# Altium PCB BEAGLEPLAYV020_220915.brd.PcbDoc (part 4 of 12)
Units mil, origin at the board's own origin, x right, y up, seen from the top; angles counter-clockwise.
Board outline 3149.7 x 3149.7 mil, 8 copper layers (TOP, LYR2_GND, LYR3, LAY4_PWR1, LAY5_PWR2, LAY6, LYR7_GND, BOTTOM), stack 60.84 mil thick; 782 components, 546 nets, 2864 pads, 2056 vias.
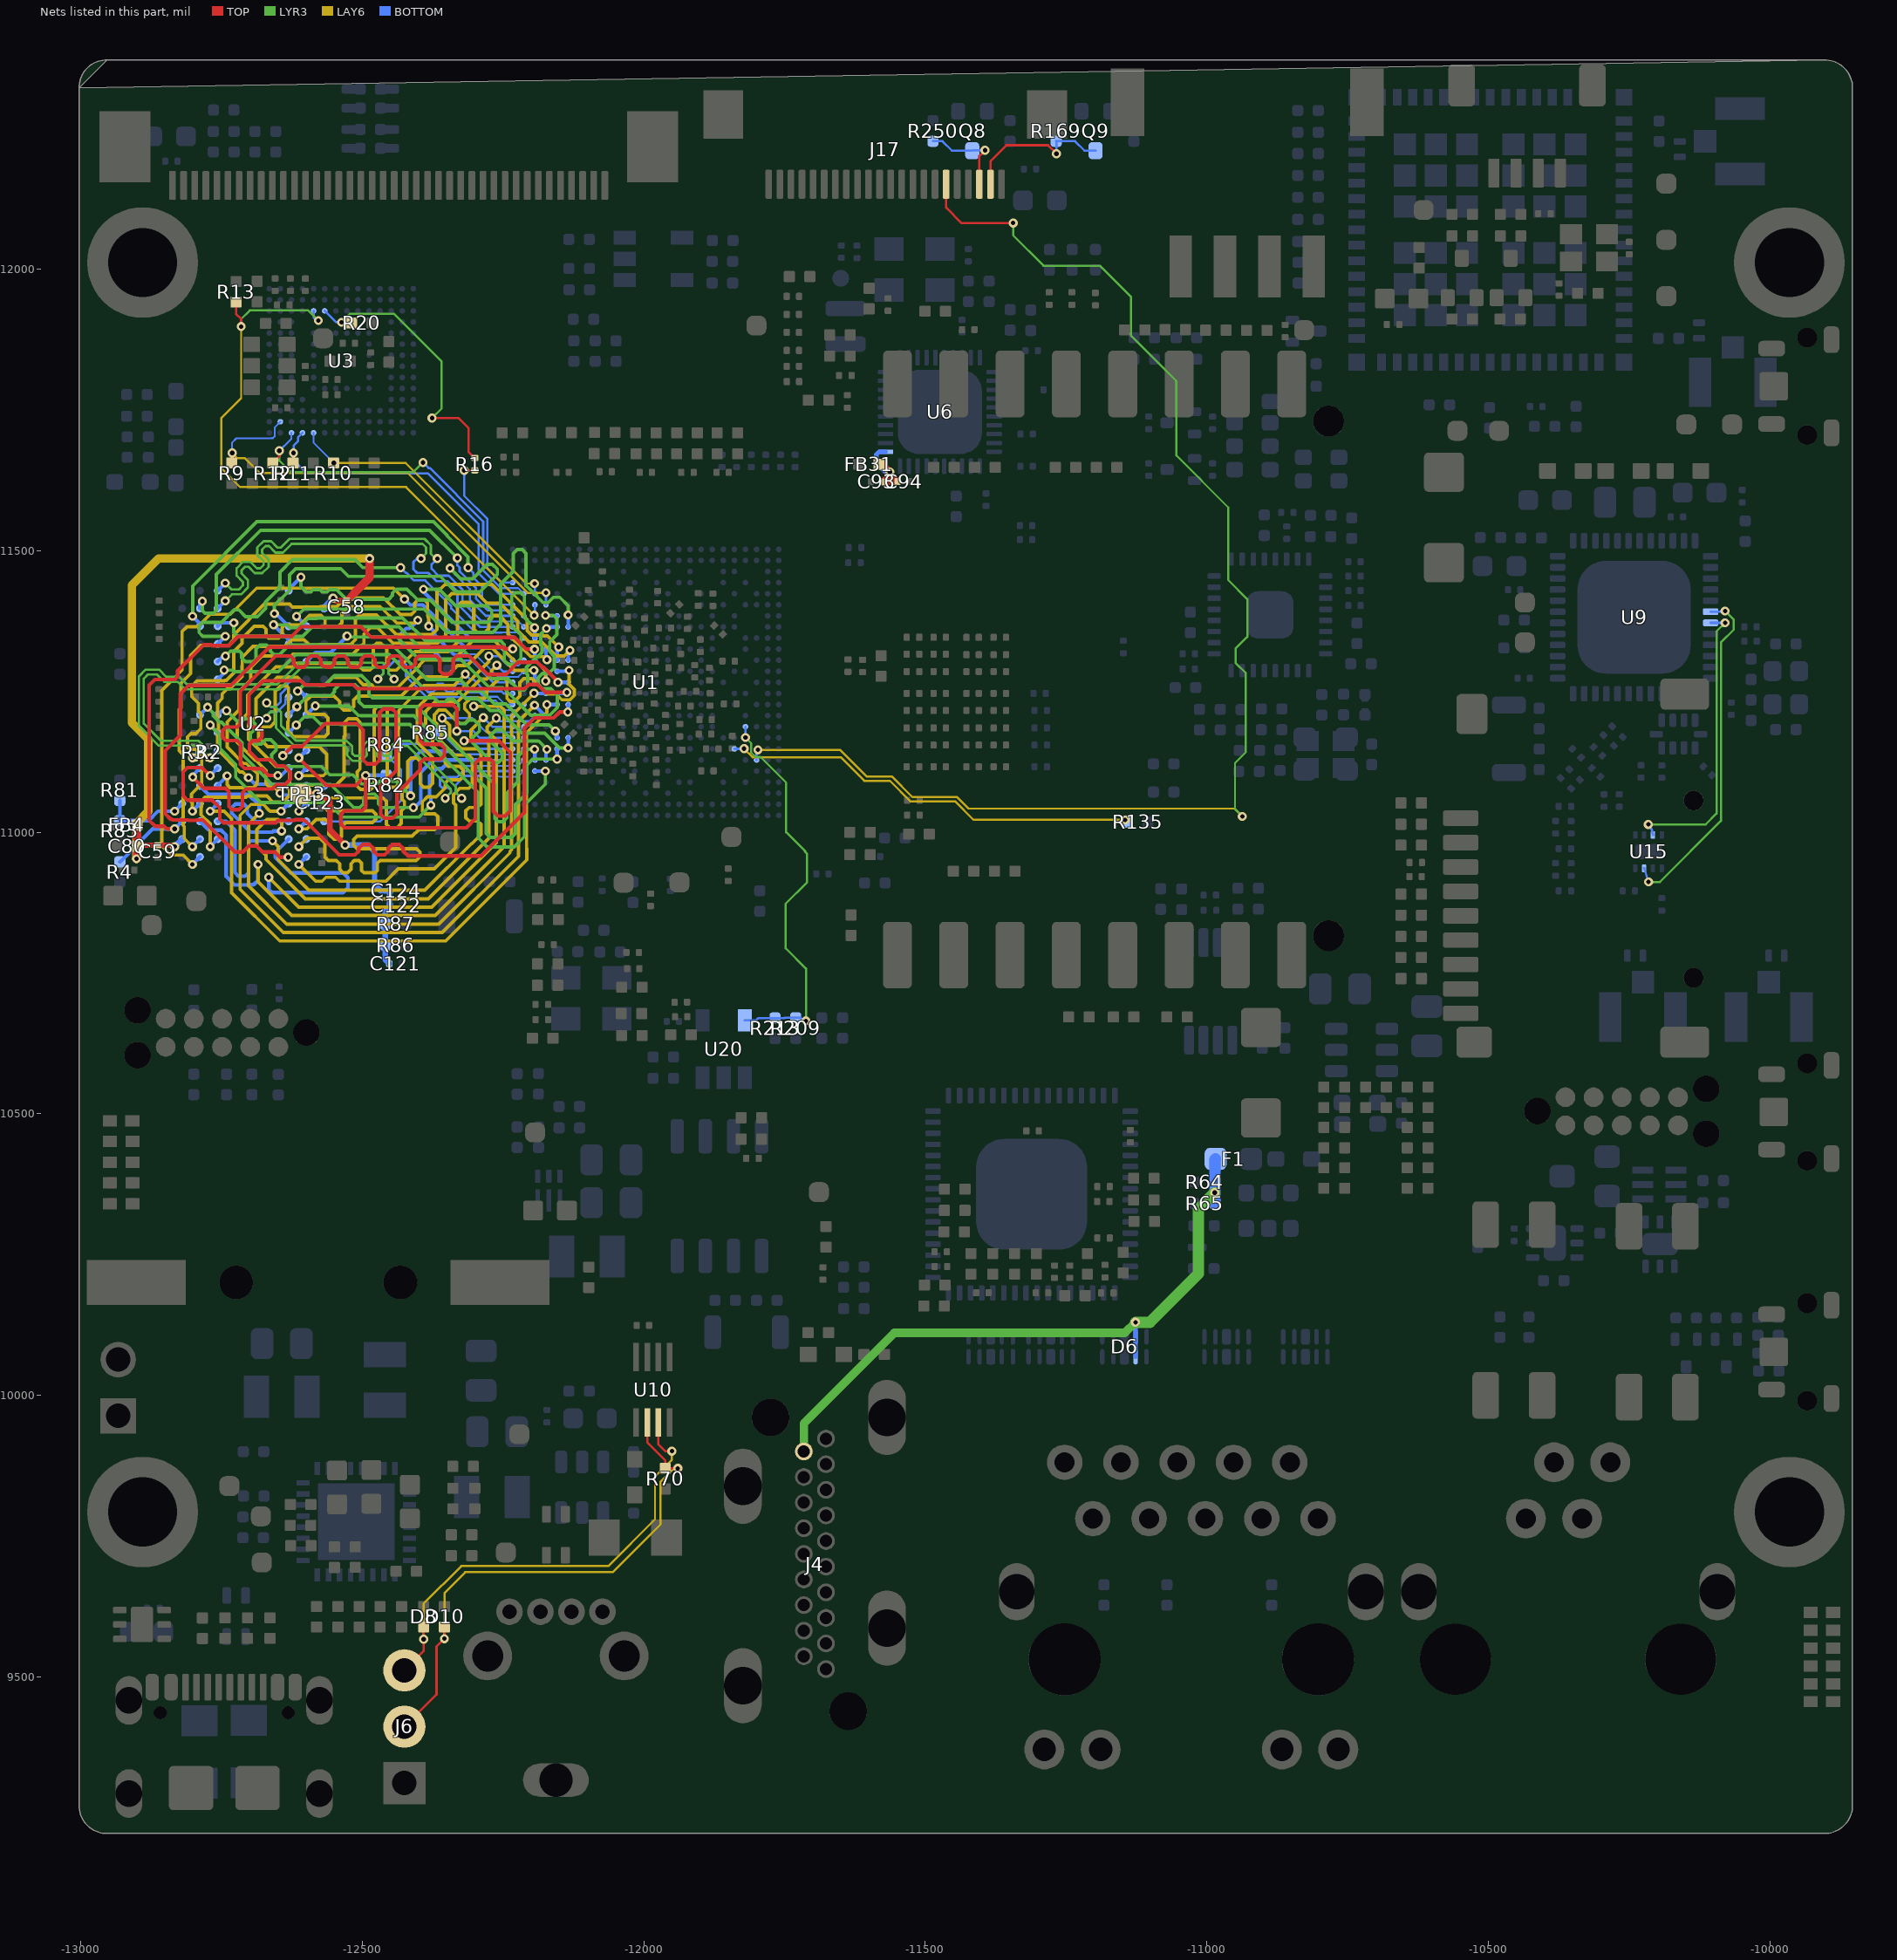
[diagram p10: the nets of this part, all layers, seen from the top]

## Via types
v1: diameter 16/0/16/0/0/0/0/16 (per signal layer), hole 8, TOP to BOTTOM, 334 vias
v2: diameter 16/16/0/0/0/0/16/16 (per signal layer), hole 8, TOP to BOTTOM, 282 vias
v3: diameter 16/0/0/0/0/16/0/16 (per signal layer), hole 8, TOP to BOTTOM, 255 vias
v4: diameter 16/16/0/0/0/16/16/16 (per signal layer), hole 8, TOP to BOTTOM, 253 vias
v5: diameter 16, hole 8, TOP to BOTTOM, 212 vias
v6: diameter 16/16/16/0/0/16/16/16 (per signal layer), hole 8, TOP to BOTTOM, 173 vias
v7: diameter 16/0/0/16/0/0/0/16 (per signal layer), hole 8, TOP to BOTTOM, 131 vias
v8: diameter 16/0/0/0/16/0/0/16 (per signal layer), hole 8, TOP to BOTTOM, 98 vias
v9: diameter 16/16/0/16/0/0/16/16 (per signal layer), hole 8, TOP to BOTTOM, 93 vias
v10: diameter 16/0/16/0/0/16/0/16 (per signal layer), hole 8, TOP to BOTTOM, 87 vias
v11: diameter 16/16/0/16/0/16/16/16 (per signal layer), hole 8, TOP to BOTTOM, 44 vias
v12: diameter 16/16/16/16/0/16/16/16 (per signal layer), hole 8, TOP to BOTTOM, 40 vias
v13: diameter 16/16/16/0/0/0/16/16 (per signal layer), hole 8, TOP to BOTTOM, 19 vias
v14: diameter 16/0/0/16/0/16/0/16 (per signal layer), hole 8, TOP to BOTTOM, 15 vias
v15: diameter 16/0/0/0/16/16/0/16 (per signal layer), hole 8, TOP to BOTTOM, 13 vias
v16: diameter 16/0/16/0/16/0/0/16 (per signal layer), hole 8, TOP to BOTTOM, 3 vias
v17: diameter 16/0/16/16/0/0/0/16 (per signal layer), hole 8, TOP to BOTTOM, 3 vias
v18: diameter 16/16/16/16/0/0/16/16 (per signal layer), hole 8, TOP to BOTTOM, 1 vias

## Nets (pads, with @x,y where several pads share a name; then routed paths per layer and width w, separated by ;. In a path a pad name is that pad's centre, name@x,y a point inside that pad or via, vN(x,y) a via of type N, cw(c..) or ccw(c..) an arc to the next point about the centre after c; other vN are vias at no path point) (continued)
CSI0_GPIO1: J17.17 U1.F23 | length 2414.5
  TOP w4: J17.17@-11463.03,12150.73 -11463.03,12109.03 -11436,12082 v1(-11344,12082)
  LYR3 w3.8: v1(-11344,12082) -11344,12060 -11290,12006 -11190,12006 -11134.5,11950.5 -11134.5,11881.5 -11054,11801 -11054,11669 -10961.9,11576.9 -10961.9,11447.9 -10928,11414 -10928,11347 -10948.9,11326.1 -10948.9,11300.9 -10931,11283 -10931,11142 -10950,11123 -10950,11041 v10(-10937,11028)
  LAY6 w3.8: -11697,11146.41 -11651.57,11146.41 -11604.36,11099.2 -11559.68,11099.2 -11522.74,11062.26 -11443.46,11062.26 -11423.2,11042 -10951,11042 v10(-10937,11028)
  LAY6 w4: v3(-11797.32,11146.41) -11697,11146.41
  BOTTOM w4: U1.F23@-11799.65,11128.4 -11799.65,11144 -11797.32,11146.33 v3(-11797.32,11146.41)
CSI0_GPIO2: R135.1 U1.G21 | length 752.4
  LAY6 w3.8: -11697,11133.21 -11650.21,11133.21 -11608.4,11091.4 -11562.92,11091.4 -11525.98,11054.46 -11446.7,11054.46 -11414.24,11022 v3(-11145,11022)
  LAY6 w4: v3(-11821.83,11148.49) -11806.55,11133.21 -11697,11133.21
  BOTTOM w4: U1.G21@-11839.02,11148.09 -11823.4,11148.09 -11823,11148.49 v3(-11821.83,11148.49) ; v3(-11145,11022) -11144.81,11022 R135.1@-11140.85,11018.04
CSI_SCL: J17.20 Q8.3 R250.2 | length 164.1
  TOP w4: J17.20@-11403.98,12150.73 -11403.98,12201.02 v5(-11394,12211)
  BOTTOM w4: R250.2@-11486.5,12227.13 -11469.65,12227.13 -11452.86,12210.34 Q8.3@-11416.66,12210.34 -11416,12211 v5(-11394,12211)
CSI_SDA: J17.21 Q9.3 R169.2 | length 275.4
  TOP w4: J17.21@-11384.29,12150.73 -11384.29,12191.71 -11356,12220 -11282,12220 v5(-11267,12205)
  BOTTOM w4: v5(-11267,12205) -11267,12226.57 R169.2@-11267.56,12227.13 -11233.95,12227.13 -11217.16,12210.34 Q9.3@-11197.66,12210.34
DDR_A0: U1.J1 U2.P3 | length 1141.4
  LAY6 w6: v3(-12643.13,11002.3) -12643.13,11016.8 -12648.84,11022.51 -12669.49,11022.51 -12687,11005 -12687,10975 -12671,10959 -12671,10951.78 -12601.22,10882 -12382.66,10882 -12275.1,10989.56 -12275.1,11158 -12280.1,11163 -12301,11163 -12307,11169 -12307,11181.7 v3(-12285,11203.7)
  BOTTOM w4: v3(-12285,11203.7) -12268.76,11187.46 U1.J1@-12232.72,11187.46
  BOTTOM w6.6: v3(-12643.13,11002.3) -12657.63,11002.3 -12659.56,11000.37 -12698.36,11000.37 -12732.05,11034.06 -12732.05,11043.4 -12725.45,11050 -12710,11050 -12704,11044 -12704,11033.58 -12689.13,11018.71 -12676.85,11018.71 -12676.11,11019.45 U2.P3@-12630.66,11019.45
DDR_A1: U1.J2 U2.P7 | length 1152.2
  LAY6 w6: v3(-12659.23,10984.77) -12648.97,10974.51 -12648.97,10950.97 -12595,10897 -12388.88,10897 -12306.18,10979.7 -12305.3,10979.7 -12289,10996 -12289,11013.99 -12295,11019.99 -12310,11019.99 -12316,11025.99 -12316,11037.99 -12310,11043.99 -12295,11043.99 -12289,11049.99 -12289,11142 -12295,11148 -12324.01,11148 -12345,11168.99 -12345,11189.7 v3(-12358,11202.7)
  BOTTOM w3.2: -12289,11186.7 -12279.96,11177.66 -12222.84,11177.66 U1.J2@-12213.04,11187.46
  BOTTOM w4: v3(-12358,11202.7) -12305,11202.7 -12289,11186.7
  BOTTOM w6.6: U2.P7@-12756.66,11019.45 -12741.66,11019.45 -12726,11003.79 -12726,10928 -12720,10922 -12708,10922 -12702,10928 -12702,10981 -12698.23,10984.77 v3(-12659.23,10984.77)
DDR_A2: U1.K3 U2.R3 | length 1154.6
  LAY6 w6: v3(-12666,10920) -12613,10867 -12376.44,10867 -12262,10981.44 -12262,11164 -12278,11180 -12278,11186.7 v3(-12262,11202.7)
  BOTTOM w3.2: v3(-12262,11202.7) -12261,11202.7 -12255.64,11197.34 -12203.15,11197.34 U1.K3@-12193.35,11207.14
  BOTTOM w6.6: v3(-12666,10920) -12666,10899 -12660,10893 -12534.25,10893 -12525.25,10902 -12525.25,10919.25 -12533.7,10927.7 -12626.69,10927.7 -12654.55,10955.56 -12654.55,10964.06 U2.R3@-12630.66,10987.95
DDR_A3: U1.L5 U2.N7 | length 1122.7
  LAY6 w6: v3(-12770.1,11037.51) -12745.5,11037.51 -12732,11024.01 -12732,10892.56 -12646.44,10807 -12351.56,10807 -12207.6,10950.96 -12207.6,10970.92 -12208.17,10971.49 -12208.17,11176.66 -12172,11212.83 v3(-12172,11226.83)
  BOTTOM w6.6: v3(-12770.1,11037.51) U2.N7@-12756.66,11050.95 ; v3(-12172,11226.83) U1.L5@-12153.98,11226.83
DDR_A4: U1.K4 U2.N3 | length 1126.5
  LAY6 w6: v3(-12644.1,11037.51) -12663.51,11037.51 -12665,11039 -12665.22,11039 -12675.6,11049.38 -12697.62,11049.38 -12717,11030 -12717,10898.78 -12640.22,10822 -12357.78,10822 -12222.6,10957.18 -12222.6,11197 v3(-12193.97,11225.63)
  BOTTOM w6.6: v3(-12644.1,11037.51) U2.N3@-12630.66,11050.95 ; v3(-12193.97,11225.63) -12175.48,11207.14 U1.K4@-12173.66,11207.14
DDR_A5: U1.K1 U2.P8 | length 1143.9
  LAY6 w6: v3(-12685,10943) -12685,10912 -12625,10852 -12370.22,10852 -12247.8,10974.42 -12247.8,11216.79 -12254.71,11223.7 v3(-12302,11223.7)
  BOTTOM w4: v3(-12302,11223.7) -12263,11223.7 -12246.44,11207.14 U1.K1@-12232.72,11207.14
  BOTTOM w6.6: U2.P8@-12788.16,11019.45 -12772.71,11004 -12763.28,11004 -12762.83,11003.55 -12750.19,11003.55 -12741.6,10994.96 -12741.6,10921.53 -12726.47,10906.4 -12701.53,10906.4 -12700.93,10907 -12693,10907 -12685,10915 v3(-12685,10943)
DDR_A6: U1.R2 U2.P2 | length 1120.7
  LAY6 w6: v3(-12612.6,11006.01) -12598.1,11006.01 -12581.6,11022.51 -12565.52,11022.51 -12559.32,11016.31 -12559.32,10996.32 -12550.43,10987.43 -12542.32,10987.43 -12537,10992.75 -12537,11009.83 -12529.32,11017.51 -12481.61,11017.51 -12475.61,11023.51 -12475.61,11032 -12481.61,11038 -12561.18,11038 -12567.19,11044.01 -12567.19,11056.5 -12562.69,11061 -12463,11061 -12457,11055 -12457,11014.31 -12451,11008.31 -12438,11008.31 -12430.67,11015.64 -12430.67,11037.9 -12425,11043.57 -12425,11054.48 -12429,11058.48 -12429,11070.92 -12419,11080.92 -12419,11125.77 -12413,11131.77 -12403,11131.77 -12397,11125.77 -12397,11086 -12391,11080 -12381.49,11080 -12375,11086.49 -12375,11132.77 -12402.2,11159.97 -12402.2,11221.03 -12377.44,11245.79 -12331.97,11245.79 -12275,11302.76 v3(-12275,11312.7)
  BOTTOM w3.2: v3(-12275,11312.7) -12257.99,11312.7 -12241.06,11295.77 -12222.84,11295.77 U1.R2@-12213.04,11305.57
  BOTTOM w6.6: v3(-12612.6,11006.01) U2.P2@-12599.16,11019.45
DDR_A7: U1.P2 U2.R8 | length 1138.5
  LAY6 w6: v3(-12801.6,10974.51) -12816,10988.91 -12816,11010.14 -12818.1,11012.24 -12818.1,11138.23 -12825,11145.13 -12825,11218 -12822,11221 -12822,11264.78 -12805,11281.78 -12805,11314.01 -12787.01,11332 -12737.89,11332 -12728.22,11341.67 -12728.22,11350.56 -12673.78,11405 -12629.01,11405 -12624.06,11400.05 -12606.84,11400.05 -12606.58,11400.31 -12575.08,11400.31 -12574.7,11400.69 -12545.55,11400.69 -12530.24,11416 -12462.07,11416 -12432.57,11386.5 -12413,11386.5 -12407,11392.5 -12407,11407 -12401,11413 -12390,11413 -12384,11407 -12384,11384.35 -12382.87,11383.22 -12382.87,11381.37 -12382,11380.5 v3(-12382,11366)
  BOTTOM w3.2: -12337.6,11316.1 -12299.4,11316.1 -12259.38,11276.08 -12222.84,11276.08 U1.P2@-12213.04,11285.88
  BOTTOM w6.6: v3(-12801.6,10974.51) U2.R8@-12788.16,10987.95 ; v3(-12382,11366) -12371.53,11355.53 -12371.53,11350.03 -12337.6,11316.1
DDR_A8: U1.P1 U2.R2 | length 1149.1
  LAY6 w6: v3(-12612.6,10974.51) -12597.6,10989.51 -12574.88,10989.51 -12566.1,10980.73 -12566.1,10956.01 -12560.09,10950 -12546.25,10950 -12540.25,10944 -12540.25,10934.14 -12534.25,10928.14 -12525.76,10928.14 -12519.76,10934.14 -12519.76,10944 -12514.12,10949.64 -12505.64,10949.64 -12501,10945 -12501,10932 -12497,10928 -12477,10928 -12473,10932 -12473,10945 -12468,10950 -12403.99,10950 -12397.48,10956.51 -12397.48,10965 -12403.48,10971 -12509,10971 -12515,10977 -12515,10987 -12509,10993 -12411.22,10993 -12399.22,11005 -12372,11005 -12366,11011 -12366,11028 -12371,11033 -12389,11033 -12393.25,11037.25 -12393.25,11053.97 -12384.22,11063 -12368.45,11063 -12353,11078.45 -12353,11086.98 -12347,11092.98 -12327,11092.98 -12321,11098.98 -12321,11110.98 -12327,11116.98 -12347,11116.98 -12353,11122.98 -12353,11131.99 -12375,11153.99 -12375,11178.39 -12387.2,11190.59 -12387.2,11214.81 -12371.22,11230.79 -12331.21,11230.79 -12289.8,11272.2 -12278.8,11272.2 -12270.9,11280.1 -12270.9,11286.8 v3(-12261,11296.7)
  BOTTOM w4: v3(-12261,11296.7) -12250.18,11285.88 U1.P1@-12232.72,11285.88
  BOTTOM w6.6: v3(-12612.6,10974.51) U2.R2@-12599.16,10987.95
DDR_A9: U1.P4 U2.R7 | length 1133.7
  LAY6 w6: v3(-12770.1,10974.51) -12770.1,11014.88 -12786.1,11030.88 -12786.1,11044.14 -12785.1,11045.14 -12785.1,11056 -12779.1,11062 -12706.22,11062 -12703.84,11064.38 -12669.38,11064.38 -12659,11054 -12640.42,11054 -12629.1,11065.32 -12629.1,11106.73 -12639.37,11117 -12654,11117 -12702,11165 -12702,11191.34 -12688.73,11204.61 -12688.73,11237.4 -12651.13,11275 -12615.22,11275 -12602.22,11262 -12565.57,11262 -12552.57,11275 -12511,11275 -12498,11262 -12483.58,11262 -12478.58,11257 -12437.11,11257 -12398.37,11295.74 -12398.37,11297.22 -12389.59,11306 -12338,11306 -12304,11340 -12265.39,11340 -12227.19,11301.8 -12189.21,11301.8 -12174.23,11286.82 v3(-12174.23,11268.6)
  BOTTOM w6.6: v3(-12770.1,10974.51) U2.R7@-12756.66,10987.95 ; v3(-12174.23,11268.6) -12173.66,11269.17 U1.P4@-12173.66,11285.88
DDR_A10: U1.R5 U2.M3 | length 1133.8
  LAY6 w6: v3(-12702,11097) -12712.26,11107.26 -12717.26,11107.26 -12757,11147 -12757,11182.27 -12755.1,11184.17 -12755.1,11196.61 -12757,11198.51 -12757,11229.33 -12748.73,11237.6 -12748.73,11245.72 -12739.56,11254.89 -12734.9,11254.89 -12713.22,11276.57 -12713.22,11295.77 -12713,11295.99 -12713,11311 -12694,11330 -12637,11330 -12625,11342 -12603.01,11342 -12593.9,11332.89 -12577.78,11332.89 -12577.28,11333.39 -12520.78,11333.39 -12512,11342.17 -12512,11379.01 -12505.01,11386 -12474.51,11386 -12439.51,11351 -12376.49,11351 -12367.5,11359.99 -12367.5,11360.5 -12367,11361 -12367,11426 -12353,11440 -12269.3,11440 -12206.97,11377.67 -12206.97,11357.87 -12199.36,11350.26 -12179.65,11350.26 -12178.39,11349 -12171,11349 v3(-12151,11329)
  BOTTOM w6.6: v3(-12702,11097) -12690.24,11085.24 -12638.88,11085.24 -12638.64,11085 -12633.21,11085 U2.M3@-12630.66,11082.45 ; U1.R5@-12153.98,11305.57 -12153.98,11326.02 v3(-12151,11329)
DDR_A11: U1.P5 U2.T2 | length 1125.4
  LAY6 w6: v3(-12612.6,10943.01) -12582.59,10913 -12571.33,10913 -12564.33,10920 -12547.33,10920 -12540.33,10913 -12458,10913 -12436,10935 -12372.1,10935 -12334,10973.1 -12334,11048 -12338,11052 -12338,11067 -12327,11078 -12311,11078 -12305,11084 -12305,11130.99 -12311.01,11137 -12335.99,11137 -12360,11161.01 -12360,11184.61 -12372.2,11196.81 -12372.2,11208.59 -12363.89,11216.9 -12352.11,11216.9 -12328.73,11193.52 -12317.98,11193.52 -12309.5,11202 -12309.5,11210.49 -12318.16,11219.15 -12318.16,11227.63 -12307.89,11237.9 -12283.1,11237.9 -12279,11242 -12279,11251 -12257,11273 -12247,11273 -12243,11269 -12243,11238 -12237.74,11232.74 -12229.26,11232.74 -12220,11242 -12220,11266 -12213,11273 -12198.72,11273 -12171.72,11246 -12156,11246 -12145.32,11235.32 -12131.2,11235.32 -12123.59,11242.93 -12123.59,11253.71 -12132.63,11262.75 v3(-12132.63,11287.58)
  BOTTOM w6.6: v3(-12612.6,10943.01) U2.T2@-12599.16,10956.45 ; U1.P5@-12153.98,11285.88 -12134.33,11285.88 v3(-12132.63,11287.58)
DDR_A12: U1.R6 U2.M7 | length 1118
  LAY6 w6: v3(-12740,11100) -12740,11084.38 -12735,11079.38 -12693.11,11079.38 -12687.11,11085.38 -12687.11,11089.26 -12686,11090.37 -12686,11103.63 -12695.37,11113 -12696.78,11113 -12706.04,11122.26 -12711.04,11122.26 -12740,11151.22 -12740,11195.78 -12718.73,11217.05 -12718.73,11249.84 -12698.22,11270.35 -12698.22,11292.78 -12678,11313 -12625.66,11313 -12622.66,11316 -12516.95,11316 -12497,11335.95 -12497,11351.99 -12485.99,11363 -12472.73,11363 -12445.73,11336 -12365.78,11336 -12352,11349.78 -12352,11413 -12341,11424 -12295.5,11424 -12278.5,11407 -12255.99,11407 -12224,11375.01 -12224,11358.03 -12203.97,11338 -12181,11338 -12156.1,11313.1 -12140.9,11313.1 v3(-12131,11323)
  BOTTOM w6.6: U2.M7@-12756.66,11082.45 -12756.66,11083.34 v3(-12740,11100) ; U1.R6@-12134.3,11305.57 -12134.3,11319.7 v3(-12131,11323)
DDR_A13: U1.R1 U2.T8 | length 1154.4
  LAY6 w6: v3(-12801.6,10943.01) -12818.1,10959.51 -12839.32,10959.51 -12856,10976.19 -12856,11252 -12820,11288 -12820,11356.22 -12811.22,11365 -12792,11365 -12770,11387 -12733.99,11387 -12687.43,11433.56 -12444.56,11433.56 v3(-12425,11414)
  BOTTOM w4: -12316,11327 -12254.15,11327 U1.R1@-12232.72,11305.57
  BOTTOM w6.6: v3(-12801.6,10943.01) U2.T8@-12788.16,10956.45 ; v3(-12425,11414) -12414.53,11403.53 -12392.53,11403.53 -12316,11327
DDR_A14_WEN: U1.N3 U2.L2 | length 1126.2
  LAY6 w6: v3(-12612.6,11100.51) -12569,11100.51 -12563,11106.51 -12563,11138.63 -12576.37,11152 -12667.78,11152 -12684,11168.22 -12684,11179.74 -12676.41,11187.33 -12663.41,11187.33 -12654.63,11196.11 -12654.63,11250.28 -12645.13,11259.78 -12634.1,11259.78 -12631.06,11256.74 -12631.06,11197.77 -12632.22,11196.61 -12632.22,11180.22 -12622,11170 -12566.16,11170 -12560.91,11175.25 -12560.91,11203.31 -12566.91,11209.31 -12594,11209.31 -12600,11215.31 -12600,11233.31 -12591.31,11242 -12549.94,11242 -12540.07,11232.13 -12540.07,11224.29 -12532.89,11217.11 -12521,11217.11 -12515,11223.11 -12515,11235 -12508,11242 -12430.89,11242 -12396.89,11276 -12350.99,11276 -12330.99,11296 -12314,11296 -12283.1,11326.9 -12269.11,11326.9 -12229.81,11287.6 v3(-12195.1,11287.6)
  BOTTOM w6.6: v3(-12612.6,11100.51) U2.L2@-12599.16,11113.95 ; v3(-12195.1,11287.6) -12193.35,11285.85 U1.N3@-12193.35,11266.2
DDR_A15_CAS: U1.M4 U2.M8 | length 1137.7
  LAY6 w6: v3(-12682.99,11033.51) -12702,11014.5 -12702,10905 -12634,10837 -12364,10837 -12237.6,10963.4 -12237.6,10966.4 -12235,10969 -12235,11206.69 v3(-12194.84,11246.85)
  BOTTOM w6.6: U2.M8@-12788.16,11082.45 -12772.85,11067.14 -12702.12,11067.14 -12682.99,11048.01 v3(-12682.99,11033.51) ; v3(-12194.84,11246.85) -12193.1,11246.85 -12192.77,11246.52 U1.M4@-12173.66,11246.52
DDR_A16_RAS: U1.M5 U2.L8 | length 1110.7
  TOP w6.6: v5(-12801,11098) -12781,11078 -12742.87,11078 -12736.87,11072 -12736.87,11046 -12730.87,11040 -12718.87,11040 -12712.87,11046 -12712.87,11070.4 -12706.27,11077 -12659.58,11077 -12652.14,11084.44 -12637.11,11084.44 -12627.8,11093.75 -12627.8,11107.27 -12638.53,11118 -12652,11118 -12662.6,11128.6 -12685.6,11128.6 -12700.4,11143.4 -12700.4,11157.06 -12695,11162.46 -12685,11162.46 -12678,11169.46 -12678,11180.46 -12684,11186.46 -12695,11186.46 -12701,11192.46 -12701,11244 -12676,11269 -12608.99,11269 -12601.99,11262 -12577.75,11262 -12577.5,11261.75 -12563.98,11261.75 -12563.73,11262 -12516,11262 -12509,11255 -12212,11255 -12204.78,11262.22 -12188.36,11262.22 -12180.24,11254.1 -12180.1,11254.1 -12174.32,11248.32 v5(-12136.59,11248.32)
  BOTTOM w6.6: v5(-12801,11098) -12801,11101.11 U2.L8@-12788.16,11113.95 ; U1.M5@-12153.98,11246.52 -12138.39,11246.52 v5(-12136.59,11248.32)
DDR_ACTN: U1.N6 U2.L3 | length 1104.6
  TOP w6.6: v5(-12650,11101) -12666.3,11101 -12678.3,11113 -12694.94,11113 -12695.24,11113.3 -12708.76,11113.3 -12716,11120.54 -12716,11156.75 -12722,11162.75 -12742,11162.75 -12748,11168.75 -12748,11180.75 -12742,11186.75 -12722,11186.75 -12716.6,11192.15 -12716.6,11250.47 -12654.07,11313 -12627.67,11313 -12621.67,11307 -12621.67,11299 -12615.67,11293 -12603.67,11293 -12597.67,11299 -12597.67,11307 -12591.67,11313 -12579.67,11313 -12573.67,11307 -12573.67,11299 -12569.02,11294.35 -12563.98,11294.35 -12562.63,11293 -12555.67,11293 -12549.67,11299 -12549.67,11307 -12543.67,11313 -12531.67,11313 -12525.67,11307 -12525.67,11299 -12519.67,11293 -12507.67,11293 -12501.67,11299 -12501.67,11307 -12495.67,11313 -12483.67,11313 -12477.67,11307 -12477.67,11299 -12471.67,11293 -12459.67,11293 -12453.67,11299 -12453.67,11307 -12447.67,11313 -12435.67,11313 -12429.67,11307 -12429.67,11299 -12423.67,11293 -12411.67,11293 -12405.67,11299 -12405.67,11307 -12399.67,11313 -12368.42,11313 -12362.42,11307 -12362.42,11287 -12356.42,11281 -12344.42,11281 -12338.42,11287 -12338.42,11307 -12332.42,11313 -12309.99,11313 -12276.99,11280 -12244.99,11280 -12222.99,11302 -12201.21,11302 -12201.11,11302.1 -12189.09,11302.1 -12179.47,11292.48 -12177.48,11292.48 -12152.33,11267.33 v5(-12152.33,11266.2)
  BOTTOM w6.6: v5(-12650,11101) -12643.61,11101 U2.L3@-12630.66,11113.95 ; v5(-12152.33,11266.2) U1.N6@-12134.3,11266.2
DDR_ALERTN: R4.2 U1.R3 U2.P9 | length 1203
  TOP w6.6: v5(-12833.1,11006.01) -12847.25,11006.01 -12851.94,11010.7 -12867.65,11010.7 -12878.3,11021.35 -12878.3,11261.17 -12868.17,11271.3 -12832.93,11271.3 -12827.59,11276.64 -12827.59,11286.63 -12783.22,11331 ; -12783.17,11331 -12781.48,11332.69 -12767.96,11332.69 -12766.46,11331.19 -12736.82,11331.19 -12720.01,11348 -12625,11348 -12608,11365 -12502.48,11365 -12483.98,11346.5 -12388.51,11346.5 -12388.01,11346 -12229.31,11346 -12208.27,11324.96 v5(-12193.97,11324.96)
  BOTTOM w6.6: R4.2@-12930.44,10947.69 -12929.59,10947.69 -12899.27,10978.01 -12899.27,10978.86 -12872.12,11006.01 v5(-12833.1,11006.01) U2.P9@-12819.66,11019.45 ; v5(-12193.97,11324.96) -12193.35,11324.34 U1.R3@-12193.35,11305.57
DDR_BA0: U1.M1 U2.N2 | length 1124.3
  LAY6 w6: v3(-12612.6,11037.51) -12612.6,11078.01 -12606.6,11084.01 -12545.99,11084.01 -12532,11098 -12532,11169.84 -12530.91,11170.93 -12530.91,11195.8 -12524.91,11201.8 -12510,11201.8 -12504,11195.8 -12504,11112.22 -12509,11107.22 -12509,11082 -12503,11076 -12485,11076 -12479,11082 -12479,11217.15 -12473,11223.15 -12461.27,11223.15 -12455.49,11217.37 -12455.49,11086.14 -12449.49,11080.14 -12441,11080.14 -12435,11086.14 -12435,11168.54 -12436.33,11169.87 -12436.33,11182.31 -12435,11183.64 -12435,11216.67 -12390.88,11260.79 -12337.06,11260.79 v3(-12317.05,11280.8)
  BOTTOM w4: v3(-12317.05,11280.8) -12307.5,11271.25 -12302.55,11271.25 -12281,11249.7 -12252,11249.7 -12248.82,11246.52 U1.M1@-12232.72,11246.52
  BOTTOM w6.6: v3(-12612.6,11037.51) U2.N2@-12599.16,11050.95
DDR_BA1: U1.N1 U2.N8 | length 1138.8
  LAY6 w6: v3(-12801.6,11037.51) -12801.6,11052.01 -12803.1,11053.51 -12803.1,11067.91 -12785.1,11085.91 -12785.1,11136.73 -12795.38,11147.01 -12805.66,11147.01 -12810,11151.35 -12810,11169.39 -12804,11175.39 -12795.38,11175.39 -12786.6,11184.17 -12786.6,11210.61 -12790.87,11214.88 -12790.87,11229.15 -12803,11241.28 -12803,11259.01 -12793.01,11269 -12744.99,11269 -12744.1,11269.89 -12741.12,11269.89 -12728.22,11282.79 -12728.22,11301.99 -12728,11302.21 -12728,11320.67 -12713.22,11335.45 -12713.22,11344.34 -12691.56,11366 -12676.3,11366 -12671,11360.7 -12671,11349.6 -12666.4,11345 -12648.48,11345 -12642.48,11351 -12642.48,11363.38 -12637.46,11368.4 -12610.39,11368.4 -12593.48,11385.31 -12573.31,11385.31 -12566,11378 -12566,11368 -12562,11364 -12543.78,11364 -12536,11371.78 -12536,11389.02 -12524.02,11401 -12468.29,11401 -12438.79,11371.5 -12406.36,11371.5 v3(-12401.25,11376.61)
  BOTTOM w4: -12365.29,11314 -12356.24,11305 -12306,11305 -12267.2,11266.2 U1.N1@-12232.72,11266.2
  BOTTOM w6.6: v3(-12801.6,11037.51) U2.N8@-12788.16,11050.95 ; v3(-12401.25,11376.61) -12411.72,11366.14 -12412.36,11366.14 -12416.51,11361.99 -12422.01,11361.99 -12433,11351 -12433,11337.9 -12424.1,11329 -12380.29,11329 -12365.29,11314
DDR_BG0: U1.T4 U2.M2 | length 1130.8
  LAY6 w6: v3(-12646,11069.64) -12656.26,11079.9 -12665,11079.9 -12671,11085.9 -12671,11109.85 -12689.15,11128 -12690.56,11128 -12722,11159.44 -12722,11192.56 -12703.73,11210.83 -12703.73,11243.62 -12653.35,11294 -12623.44,11294 -12617.44,11300 -12508.88,11300 -12504.39,11295.51 -12504.39,11294 -12498.39,11288 -12486.39,11288 -12480.39,11294 -12480.39,11330 -12474.39,11336 -12466.95,11336 -12456.2,11325.25 -12456.2,11293.2 -12451,11288 -12439.39,11288 -12406.39,11321 -12347,11321 ; -12241,11352 -12227.72,11338.72 -12227.33,11338.72 -12200.57,11311.96 -12177.35,11311.96 v3(-12171.96,11306.57)
  LAY6 w6.6: -12347,11321 -12331,11337 -12331,11400.4 -12323.4,11408 -12309,11408 -12302,11401 -12302,11361 -12296,11355 -12281.6,11355 -12275,11361.6 -12275,11378.23 -12268.4,11384.83 -12256.83,11384.83 -12241,11369 -12241,11352
  BOTTOM w6.6: v3(-12646,11069.64) -12642.36,11066 -12615.61,11066 U2.M2@-12599.16,11082.45 ; U1.T4@-12173.66,11325.26 -12173.66,11308.27 v3(-12171.96,11306.57)
DDR_CKE: R82.1 U1.H2 U2.K2 | length 1140.4
  TOP w6.6: v5(-12612.6,11132.01) -12563.59,11083 -12511.54,11083 -12504.26,11090.28 -12504.26,11090.74 v5(-12494,11101) -12494,11044.6 -12500.6,11038 -12531.4,11038 -12538,11031.4 -12538,11014.6 -12531.4,11008 -12315,11008 -12299,11024 -12299,11123 -12292,11130 -12273,11130 -12267,11124 -12267,11037 -12259,11029 -12246,11029 -12237,11038 -12237,11142 -12257.46,11162.46 v5(-12319,11162.46)
  BOTTOM w3.2: -12278.28,11157.98 -12222.84,11157.98 U1.H2@-12213.04,11167.78
  BOTTOM w4: v5(-12319,11162.46) -12300.26,11162.46 -12295.78,11157.98 -12278.28,11157.98
  BOTTOM w6.6: v5(-12612.6,11132.01) U2.K2@-12599.16,11145.45 ; v5(-12494,11101) -12493.59,11101.41 R82.1@-12457.16,11101.41
DDR_CLKN: R3.1 U1.L2 U2.K8 | length 1077.3
  LYR3 w4.3: v1(-12801.6,11132.01) -12790.2,11143.41 -12790.2,11149.5 -12794.5,11153.8 -12861.11,11153.8 -12896.7,11189.39 -12896.7,11276.61 -12884.51,11288.8 -12860.91,11288.8 -12847.96,11275.85 -12824.58,11275.85 -12811.43,11262.7 -12650.6,11262.7 -12612.12,11301.18 -12463.07,11301.18 -12453.5,11291.61 -12453.5,11282.17 v1(-12443.33,11272)
  BOTTOM w3.2: -12288.9,11233.7 -12262.9,11233.7 -12246.23,11217.03 -12229.91,11217.03 -12229.82,11216.94 -12222.93,11216.94 U1.L2@-12213.04,11226.83
  BOTTOM w4: -12295.2,11240 -12288.9,11233.7
  BOTTOM w4.3: v1(-12443.33,11272) -12453.69,11282.36 -12453.69,11293.57 -12443.56,11303.7 -12428.44,11303.7 -12422.3,11297.56 -12422.3,11276.56 -12385.74,11240 -12295.2,11240
  BOTTOM w6.6: v1(-12801.6,11132.01) U2.K8@-12788.16,11145.45
DDR_CLKP: R2.1 U1.L1 U2.K7 | length 1077.6
  LYR3 w4.3: v1(-12770.1,11132.01) -12781.5,11143.41 -12781.5,11153.11 -12790.89,11162.5 -12857.5,11162.5 -12888,11193 -12888,11273 -12880.9,11280.1 -12864.52,11280.1 -12851.57,11267.15 -12828.19,11267.15 -12815.04,11254 -12646.99,11254 -12608.51,11292.48 -12552.75,11292.48 ; -12552.65,11292.48 -12466.68,11292.48 -12462.2,11288 -12462.2,11282.16 v1(-12472.36,11272)
  BOTTOM w3.2: -12282,11240.7 -12260.01,11240.7 -12246.14,11226.83 U1.L1@-12232.72,11226.83
  BOTTOM w4: -12292.46,11249 -12284.16,11240.7 -12282,11240.7
  BOTTOM w4.3: v1(-12472.36,11272) -12461.99,11282.37 -12461.99,11297.01 -12447,11312 -12425,11312 -12414,11301 -12414,11280 -12383,11249 -12374.44,11249 -12370.14,11253.3 -12370.14,11259.7 -12365.84,11264 -12357.24,11264 -12352.94,11259.7 -12352.94,11253.3 -12348.64,11249 -12340.04,11249 -12335.74,11253.3 -12335.74,11259.7 -12331.44,11264 -12322.84,11264 -12318.54,11259.7 -12318.54,11253.3 -12314.24,11249 -12292.46,11249
  BOTTOM w6.6: v1(-12770.1,11132.01) U2.K7@-12756.66,11145.45
DDR_CSN: U1.L6 U2.L7 | length 1110
  TOP w6.6: v5(-12770.1,11100.51) -12784.59,11115 -12810.17,11115 -12817.9,11107.27 -12817.9,11105.43 -12818,11105.33 -12818,11064.9 -12810.1,11057 -12766.59,11057 -12763.4,11053.81 -12763.34,11053.81 -12753.8,11044.27 -12753.8,11044.21 -12753,11043.41 -12753,11023.6 -12746.4,11017 -12653.62,11017 -12649.62,11021 -12620.67,11021 -12619.36,11022.31 -12605.84,11022.31 -12604.53,11021 -12602,11021 -12541,10960 -12513,10960 -12506.4,10966.6 -12506.4,10971.4 -12499.8,10978 -12486.6,10978 -12480,10971.4 -12480,10966.6 -12473.4,10960 -12460.2,10960 -12453.6,10966.6 -12453.6,10971.4 -12447,10978 -12433.8,10978 -12427.2,10971.4 -12427.2,10966.6 -12418.6,10958 -12288.99,10958 -12212,11034.99 -12212,11185 -12194,11203 -12160,11203 -12149.3,11213.7 v5(-12135,11213.7)
  BOTTOM w6.6: v5(-12770.1,11100.51) U2.L7@-12756.66,11113.95 ; v5(-12135,11213.7) -12134.3,11214.4 U1.L6@-12134.3,11226.83
DDR_DQ0: U1.F4 U2.G2 | length 731.5
  LYR3 w6: v1(-12614.78,11250.78) -12604.52,11261.04 -12566.11,11261.04 -12549.15,11278 -12546.69,11278 ; -12546.66,11278.03 -12506.43,11278.03 ; -12506.4,11278 -12501,11278 -12488.04,11265.04 -12488.04,11245 -12482.04,11239 -12372.49,11239 -12363.42,11229.93 -12354.08,11229.93 -12347.67,11236.34 -12338.33,11236.34 -12329,11227.01 -12329,11217.67 -12335.41,11211.26 -12335.41,11201.92 -12326.08,11192.59 -12316.74,11192.59 -12310.33,11199 -12300.99,11199 -12291.66,11189.67 -12291.66,11180.33 -12303.82,11168.17 -12303.82,11158.83 -12268.67,11123.68 -12258.32,11123.68 -12251.17,11130.83 -12251.17,11140.17 -12271.83,11160.83 -12271.83,11172.17 -12261.67,11182.33 -12252.33,11182.33 -12231.96,11161.96 -12187.96,11161.96 -12187.66,11161.66 -12186.17,11161.66 v1(-12171.97,11147.46)
  BOTTOM w6.6: v1(-12614.78,11250.78) -12609.99,11250.78 U2.G2@-12599.16,11239.95 ; U1.F4@-12173.66,11128.4 -12173.66,11145.77 v1(-12171.97,11147.46)
DDR_DQ1: U1.H6 U2.F7 | length 732.7
  LYR3 w6: v1(-12745.09,11287.87) -12730.29,11287.87 -12727.42,11285 -12648.74,11285 -12618.11,11315.63 -12451.71,11315.63 -12391.48,11255.4 -12334.39,11255.4 -12315.99,11237 -12296.49,11237 -12296.19,11236.7 -12293.69,11236.7 -12272.99,11216 -12256.49,11216 -12216.49,11176 -12176,11176 -12149.71,11149.71 v1(-12134.3,11149.71)
  BOTTOM w6.6: U2.F7@-12756.66,11271.45 -12745.09,11283.02 v1(-12745.09,11287.87) ; v1(-12134.3,11149.71) U1.H6@-12134.3,11167.78
DDR_DQ2: U1.F3 U2.H3 | length 736.5
  LYR3 w6: v1(-12616.06,11223.06) -12596.12,11243 -12555.75,11243 -12549.15,11249.6 -12549.15,11253.47 -12540.19,11262.43 -12512.9,11262.43 -12506,11255.53 -12506,11231.96 -12497.04,11223 -12402.46,11223 -12264,11084.54 -12264,11023.96 -12258.94,11018.9 -12249.6,11018.9 -12243,11025.5 -12243,11070.01 -12224,11089.01 -12224,11133.99 -12210.53,11147.46 v1(-12193.97,11147.46)
  BOTTOM w6.6: U2.H3@-12630.66,11208.46 v1(-12616.06,11223.06) ; v1(-12193.97,11147.46) -12193.35,11146.84 U1.F3@-12193.35,11128.4
DDR_DQ3: U1.G2 U2.H7 | length 752.2
  LYR3 w6: v1(-12741,11216) -12722.59,11197.59 -12713.25,11197.59 -12709.09,11201.75 -12699.75,11201.75 -12690.42,11192.42 -12690.42,11183.08 -12698.31,11175.19 -12698.31,11165.85 -12688.98,11156.52 -12679.64,11156.52 -12671.75,11164.41 -12662.41,11164.41 -12653.08,11155.08 -12653.08,11145.74 -12660.97,11137.85 -12660.97,11128.51 -12649.17,11116.71 -12572.7,11116.71 -12557.99,11102 -12516.64,11102 -12500.34,11085.7 -12474.3,11085.7 -12469,11091 -12440.3,11091 v1(-12414,11064.7)
  BOTTOM w3.2: -12271.59,11138.29 -12222.84,11138.29 U1.G2@-12213.04,11148.09
  BOTTOM w4: -12341.3,11144 -12335.59,11138.29 -12271.59,11138.29
  BOTTOM w6.6: U2.H7@-12756.66,11208.45 -12749.11,11216 v1(-12741,11216) ; v1(-12414,11064.7) -12414,11125.7 -12395.7,11144 -12341.3,11144
DDR_DQ4: U1.G5 U2.H2 | length 730.3
  LYR3 w6: v1(-12583.3,11224.31) -12523.3,11224.31 -12506.39,11207.4 -12502.66,11207.4 -12502.25,11206.99 -12408.52,11206.99 -12280,11078.47 -12280,10998 -12273,10991 -12235,10991 -12228,10998 -12228,11048.99 -12207.27,11069.72 -12207.27,11119.73 -12196.97,11130.03 v1(-12153.98,11130.03)
  BOTTOM w6.6: U2.H2@-12599.16,11208.45 v1(-12583.3,11224.31) ; v1(-12153.98,11130.03) U1.G5@-12153.98,11148.09
DDR_DQ5: U1.F1 U2.H8 | length 747.5
  LYR3 w6: v1(-12774.72,11221.89) -12764.46,11211.63 -12764.46,11206.82 -12753.16,11195.52 -12750.05,11195.52 -12713.54,11159.01 -12713.54,11138.53 -12660.01,11085 -12556,11085 -12515,11044 -12504.35,11044 -12497.75,11050.6 -12497.75,11061.4 -12491.15,11068 -12477.95,11068 -12471.35,11061.4 -12471.35,11050.6 -12464.75,11044 v1(-12409,11044)
  BOTTOM w4: -12297.66,11128.4 U1.F1@-12232.72,11128.4
  BOTTOM w6.6: U2.H8@-12788.16,11208.45 v1(-12774.72,11221.89) ; v1(-12409,11044) -12406.7,11044 -12396,11054.7 -12396,11106.7 -12374.3,11128.4 -12297.66,11128.4
DDR_DQ6: U1.E3 U2.J3 | length 731.3
  LYR3 w6: v1(-12617.22,11190.39) -12602.61,11205 -12587,11205 -12574.45,11192.45 -12539.57,11192.45 -12538.51,11191.39 -12414.99,11191.39 -12294,11070.4 -12294,10990 -12278,10974 -12230,10974 -12212,10992 -12212,11048 -12174.72,11085.28 v1(-12174.72,11108.72)
  BOTTOM w6.6: U2.J3@-12630.66,11176.95 v1(-12617.22,11190.39) ; U1.E3@-12193.35,11108.72 v1(-12174.72,11108.72)
DDR_DQ7: U1.F2 U2.J7 | length 748.1
  LYR3 w6: v1(-12770.1,11190.39) -12759.63,11179.92 ; -12759.6,11179.92 -12753,11173.32 -12753,11148.99 -12724.7,11120.69 -12724.7,11097.69 -12680.01,11053 -12561.06,11053 -12535.06,11027 -12399,11027 v1(-12378,11048)
  BOTTOM w3.2: -12309,11117.7 -12237.6,11117.7 -12236.78,11118.52 -12228.66,11118.52 -12227.84,11117.7 -12223.74,11117.7 U1.F2@-12213.04,11128.4
  BOTTOM w4: -12353.63,11117.7 -12309,11117.7
  BOTTOM w6.6: v1(-12770.1,11190.39) U2.J7@-12756.66,11176.95 ; v1(-12378,11048) -12378,11062.8 -12380.4,11065.2 -12380.4,11100.23 -12367.83,11112.8 -12358.53,11112.8 -12353.63,11117.7
DDR_DQ8: U1.U1 U2.A3 | length 789.3
  LYR3 w6: v1(-12608.8,11453) -12608.8,11436.01 -12599.79,11427 -12591.25,11427 -12587.64,11430.61 -12574.96,11430.61 -12571.35,11427 -12562.1,11427 -12558.11,11430.99 -12545.43,11430.99 -12528.44,11414 -12452.59,11414 -12445.99,11420.6 -12445.99,11425.05 -12439.39,11431.65 -12420.65,11431.65 -12401,11412 -12379,11412 -12340,11373 -12276.6,11373 -12270,11379.6 -12270,11393.4 -12278.6,11402 -12333.99,11402 -12363.64,11431.65 v1(-12391.35,11431.65)
  BOTTOM w4: -12308.94,11344.94 U1.U1@-12232.72,11344.94
  BOTTOM w6.6: U2.A3@-12630.66,11428.95 -12630.66,11431.14 v1(-12608.8,11453) ; v1(-12391.35,11431.65) -12391.35,11427.35 -12308.94,11344.94
DDR_DQ9: U1.W2 U2.B8 | length 788.4
  LYR3 w6: v1(-12783.95,11410.42) -12783.95,11393.89 -12779.06,11389 -12763.68,11389 -12759,11393.68 -12759,11457.68 -12680.53,11536.15 -12380.15,11536.15 v1(-12331,11487)
  BOTTOM w3.2: -12244.41,11394.11 -12222.84,11394.11 U1.W2@-12213.04,11384.31
  BOTTOM w4: v1(-12331,11487) -12331,11474 -12327,11470 -12327,11463 -12298,11434 -12298,11415 -12277.11,11394.11 -12244.41,11394.11
  BOTTOM w6.6: U2.B8@-12788.16,11397.45 -12788.16,11406.21 v1(-12783.95,11410.42)
DDR_DQ10: U1.W1 U2.C3 | length 791.9
  LYR3 w6: v1(-12655.89,11388.34) -12655.89,11402.84 -12629,11429.73 -12629,11457 -12618,11468 -12537.99,11468 -12524.39,11454.4 -12361.4,11454.4 -12334,11427 -12291,11427 -12260,11458 -12260,11467.34 -12268.66,11476 -12278,11476 -12304,11450 -12325,11450 v1(-12344,11469)
  BOTTOM w4: v1(-12344,11469) -12334.8,11459.8 -12334.8,11457.8 -12309,11432 -12309,11413.01 -12280.3,11384.31 U1.W1@-12232.72,11384.31
  BOTTOM w6.6: v1(-12655.89,11388.34) -12653.05,11388.34 U2.C3@-12630.66,11365.95
DDR_DQ11: U1.V5 U2.C7 | length 770.6
  LYR3 w6: v1(-12728,11372) -12728,11354.6 -12721.4,11348 -12605.53,11348 -12589.74,11363.79 -12574.14,11363.79 -12572.93,11365 -12434.77,11365 -12393.19,11323.42 -12320.41,11323.42 -12269.99,11273 -12242.01,11273 -12221.94,11252.93 -12212.6,11252.93 -12206,11259.53 -12206,11279.69 -12208.4,11282.09 -12208.4,11293.11 -12189.85,11311.66 -12188.46,11311.66 -12180.67,11319.45 -12180.67,11330.47 -12183.12,11332.92 -12183.12,11351.88 v1(-12173,11362)
  BOTTOM w6.6: U2.C7@-12756.66,11365.95 -12750.61,11372 v1(-12728,11372) ; v1(-12173,11362) -12170.38,11364.62 U1.V5@-12153.98,11364.62
DDR_DQ12: U1.V6 U2.C2 | length 771.2
  LYR3 w6: v1(-12616.61,11383.4) -12603.61,11396.4 -12390.76,11396.4 -12349.36,11355 -12268.4,11355 -12254,11369.4 -12254,11441.01 -12231.54,11463.47 -12231.54,11495.25 -12224.94,11501.85 -12215.6,11501.85 -12209,11495.25 -12209,11438 -12207.27,11436.27 -12207.27,11436.17 -12199.48,11428.38 -12199.38,11428.38 -12178.93,11407.93 -12169.58,11407.93 -12160.21,11417.3 -12149.19,11417.3 -12134.3,11402.41 v1(-12134.3,11386)
  BOTTOM w6.6: v1(-12616.61,11383.4) U2.C2@-12599.16,11365.95 ; U1.V6@-12134.3,11364.62 v1(-12134.3,11386)
DDR_DQ13: U1.Y1 U2.C8 | length 782.6
  LYR3 w6: v1(-12801.26,11383.68) -12801.26,11437.49 -12687,11551.75 -12373.68,11551.75 -12349.4,11527.47 -12349.4,11526.4 -12312,11489 v1(-12312,11470)
  BOTTOM w4: v1(-12312,11470) -12302.8,11460.8 -12302.8,11452.39 -12287.2,11436.79 -12287.2,11417.19 -12286.69,11416.68 -12286.69,11416.04 -12274.65,11404 U1.Y1@-12232.72,11404
  BOTTOM w6.6: v1(-12801.26,11383.68) -12788.16,11370.58 U2.C8@-12788.16,11365.95
DDR_DQ14: U1.U3 U2.D3 | length 775.3
  LYR3 w6: v1(-12657.48,11368.4) -12633.4,11368.4 -12628.6,11363.6 -12612,11363.6 -12596.21,11379.39 -12580.61,11379.39 -12579.4,11380.6 -12428.3,11380.6 -12387.7,11340 -12254.3,11340 -12247.7,11333.4 -12247.7,11304.72 -12241.1,11298.12 -12228.87,11298.12 -12218.2,11308.79 -12218.2,11350.2 -12234.54,11366.54 -12234.54,11418.9 -12227.94,11425.5 -12218.6,11425.5 -12212,11418.9 -12212,11381.29 v1(-12193.97,11363.26)
  BOTTOM w6.6: v1(-12657.48,11368.4) -12630.66,11341.58 U2.D3@-12630.66,11334.45 ; v1(-12193.97,11363.26) -12193.35,11362.64 U1.U3@-12193.35,11344.94
DDR_DQ15: U1.U2 U2.D7 | length 798.1
  LYR3 w6: v1(-12743.22,11347.89) -12783.1,11347.89 -12789.7,11354.49 -12789.7,11366.4 -12783.1,11373 -12749.93,11373 -12728.14,11394.79 -12718.79,11394.79 -12707.07,11383.07 -12685.93,11383.07 -12671.49,11397.51 -12671.49,11409.31 -12646,11434.8 -12646,11462.07 -12624.07,11484 -12513,11484 -12499,11470 v1(-12432,11470)
  BOTTOM w3.2: -12252,11354.74 -12222.84,11354.74
  BOTTOM w4: v1(-12432,11470) -12422.45,11460.45 -12421.05,11460.45 -12408.01,11447.41 -12388.01,11447.41 -12342,11401.4 -12342,11397.33 -12299.41,11354.74 -12252,11354.74 ; -12222.84,11354.74 U1.U2@-12213.04,11344.94
  BOTTOM w6.6: U2.D7@-12756.66,11334.45 v1(-12743.22,11347.89)
DDR_LDM: U1.H5 U2.E7 | length 735.1
  LYR3 w6: v1(-12743,11312.6) -12734.03,11321.57 -12718,11321.57 -12714,11317.57 -12714,11309.6 -12707.4,11303 -12693.25,11303 -12688.48,11307.77 -12688.48,11325.69 -12681.88,11332.29 -12669.68,11332.29 -12663.08,11325.69 -12663.08,11321.83 -12656.48,11315.23 -12647.14,11315.23 -12630.08,11332.29 -12530.57,11332.29 -12529.51,11331.23 -12445.24,11331.23 -12385.01,11271 -12326.06,11271 -12306.06,11251 -12288.01,11251 -12265.01,11228 -12245.01,11228 -12208.01,11191 -12168.3,11191 v1(-12157,11179.7)
  BOTTOM w6.6: U2.E7@-12756.66,11302.95 -12747.01,11312.6 v1(-12743,11312.6) ; v1(-12157,11179.7) -12153.98,11176.68 U1.H5@-12153.98,11167.78
DDR_LDQS_N: U1.E2 U2.F3 | length 745.1
  LYR3 w4.3: v1(-12669.73,11229.76) -12662.73,11222.76 -12653.59,11222.76 -12644.2,11213.37 -12644.2,11189.2 -12617.85,11162.85 -12528.21,11162.85 -12517.91,11152.55 -12517.91,11140 -12513.61,11135.7 -12505.01,11135.7 -12500.71,11140 -12500.71,11151.61 -12491.32,11161 -12475.5,11161 -12466.11,11151.61 -12466.11,11140 -12461.81,11135.7 -12453.21,11135.7 -12448.91,11140 -12448.91,11152.55 -12439.52,11161.94 -12415.42,11161.94 -12334,11080.52 -12334,11070.83 v1(-12323.6,11060.43)
  BOTTOM w3.2: -12260.59,11100.01 -12260.09,11099.37 -12255,11098.84 -12222.92,11098.84 U1.E2@-12213.04,11108.72
  BOTTOM w4.3: v1(-12669.73,11229.76) -12662.27,11222.3 -12654.11,11222.3 -12644.81,11231.6 -12644.81,11245.82 -12632.55,11258.08 -12632.55,11270.51 -12631.61,11271.45 U2.F3@-12630.66,11271.45 ; v1(-12323.6,11060.43) -12333.96,11070.79 -12333.96,11084 -12317.95,11100.01 -12260.59,11100.01
DDR_LDQS_P: U1.E1 U2.G3 | length 746.9
  LYR3 w4.3: v1(-12669.63,11202.33) -12669.63,11207.17 -12662.74,11214.06 -12657.2,11214.06 -12652.9,11209.76 -12652.9,11185.59 -12621.46,11154.15 -12531.82,11154.15 -12526.61,11148.94 -12526.61,11136.39 -12517.22,11127 -12501.4,11127 -12492.01,11136.39 -12492.01,11148 -12487.71,11152.3 -12479.11,11152.3 -12474.81,11148 -12474.81,11136.39 -12465.42,11127 -12449.6,11127 -12440.21,11136.39 -12440.21,11148.94 -12435.91,11153.24 -12419.03,11153.24 -12343,11077.21 -12343,11070.06 v1(-12352.63,11060.43)
  BOTTOM w3.2: -12260,11108.62 -12259.81,11108.62
  BOTTOM w4.3: v1(-12669.63,11202.33) -12669.63,11207.17 -12662.8,11214 -12650.67,11214 -12636.51,11228.16 -12636.51,11235.65 -12632.21,11239.95 U2.G3@-12630.66,11239.95 ; v1(-12352.63,11060.43) -12342.26,11070.8 -12342.26,11074.26 -12347,11079 -12358.36,11079 -12362,11082.64 -12362,11094.24 -12358.24,11098 -12331.7,11098 -12321.39,11108.31 -12260.31,11108.31 -12260,11108.62 ; -12259.81,11108.62 -12259.69,11108.72 U1.E1@-12232.72,11108.72
DDR_ODT: U1.H1 U2.K3 | length 1107.5
  TOP w6.6: v5(-12641,11136) -12629.47,11147.53 -12628.58,11147.53 -12623.56,11152.55 -12606.45,11152.55 -12566,11193 -12509.6,11193 -12498,11181.4 -12498,11128.14 -12491.4,11121.54 -12475.6,11121.54 -12469,11128.14 -12469,11212.4 -12462.4,11219 -12446.6,11219 -12440,11212.4 -12440,11109 -12467,11082 -12467,11031.6 -12460.4,11025 -12446,11025 -12438,11033 -12438,11070 -12397,11111 -12397,11123.21 -12390.4,11129.81 -12360.6,11129.81 -12354,11136.41 -12354,11149.61 -12360.6,11156.21 -12390.4,11156.21 -12397,11162.81 -12397,11219.4 -12390.4,11226 -12338.6,11226 -12332,11219.4 v5(-12332,11179.7)
  BOTTOM w4: v5(-12332,11179.7) -12303,11179.7 -12291.08,11167.78 U1.H1@-12232.72,11167.78
  BOTTOM w6.6: v5(-12641,11136) -12631.55,11145.45 U2.K3@-12630.66,11145.45
DDR_PARITY: U1.T1 U2.T3 | length 1110.9
  TOP w6.6: v5(-12631.55,10955.56) -12646.05,10955.56 -12655.49,10965 -12677.07,10965 -12688.07,10976 -12701.07,10976 -12712.07,10965 -12725.99,10965 -12782.99,11022 -12794.05,11022 -12794.84,11021.21 -12808.36,11021.21 -12809.15,11022 -12836.99,11022 -12838,11023.01 -12840.01,11023.01 -12850,11033 -12850,11145.01 -12823,11172.01 -12823,11245.97 -12807.97,11261 -12732.74,11261 -12664.74,11329 -12250,11329 -12246.72,11325.72 v5(-12232.72,11325.72)
  BOTTOM w4: U1.T1@-12232.72,11325.26 v5(-12232.72,11325.72)
DDR_RESET#: R84.2 R85.1 U1.G1 U2.P1 | length 497
  BOTTOM w4: U2.P1@-12567.66,11019.45 -12468.25,11019.45 -12431,11056.7 -12431,11111.35 R84.2@-12457.16,11137.51 -12437.67,11157 -12402.93,11157 -12401.63,11158.3 -12379.77,11158.3 R85.1@-12360.51,11177.56 -12331.04,11148.09 U1.G1@-12232.72,11148.09
DDR_TEN: R81.2 R83.1 U2.N9 | length 158.9
  BOTTOM w6.6: R81.2@-12930.44,11056.39 R83.1@-12930.44,11020.77 -12879.43,11020.77 -12862.69,11037.51 v5(-12833.1,11037.51) U2.N9@-12819.66,11050.95
DDR_UDM: U1.W5 U2.E2 | length 779.1
  LYR3 w6: v1(-12527,11348.39) -12524.6,11348.39 -12523.04,11346.83 -12438.67,11346.83 -12399.66,11307.82 -12325.68,11307.82 -12311.96,11294.1 -12311.54,11294.1 -12274.44,11257 -12249.99,11257 -12200.99,11208 -12167.02,11208 -12153.7,11221.32 -12153.7,11243.7 -12165.3,11255.3 -12179.74,11255.3 -12187.53,11263.09 -12187.53,11274.11 -12179.74,11281.9 -12168.72,11281.9 -12158.8,11291.82 -12158.8,11300.92 -12158.66,11301.06 -12158.66,11312.08 -12167,11320.42 -12167,11338.01 -12154,11351.01 -12154,11378.9 -12160.17,11385.07 v1(-12174.47,11385.07)
  BOTTOM w6.6: U2.E2@-12599.16,11302.95 -12583.12,11318.99 -12556.4,11318.99 v1(-12527,11348.39) ; v1(-12174.47,11385.07) -12171.07,11385.07 -12170.31,11384.31 U1.W5@-12153.98,11384.31
DDR_UDQS_N: U1.V2 U2.A7 | length 789.2
  LYR3 w4.3: v1(-12743.22,11442.39) -12732.12,11431.29 -12718.71,11431.29 -12711.7,11438.3 -12711.7,11444.36 -12723.01,11455.67 -12723.01,11468.97 -12711.83,11480.15 -12698.53,11480.15 -12687.22,11468.84 -12681.16,11468.84 -12675.02,11474.98 -12675.02,11481.04 -12686.33,11492.35 -12686.33,11505.65 -12675.15,11516.83 -12661.85,11516.83 -12650.54,11505.52 -12644.48,11505.52 -12629,11521 -12389.39,11521 -12378,11509.61 -12378,11494.39 -12369.66,11486.05 v1(-12366.63,11486.05)
  BOTTOM w3.2: -12269.81,11374.93 -12269.3,11374.42 -12222.84,11374.42 U1.V2@-12213.04,11364.62
  BOTTOM w4: -12288,11375 -12281.99,11375 -12281.92,11374.93 -12269.81,11374.93
  BOTTOM w4.3: v1(-12366.63,11486.05) -12376.79,11475.89 -12376.79,11467.79 -12364.65,11455.65 -12346.65,11455.65 -12322,11431 -12322,11409 -12288,11375
  BOTTOM w6.6: U2.A7@-12756.66,11428.95 v1(-12743.22,11442.39)
DDR_UDQS_P: U1.V1 U2.B7 | length 791.5
  LYR3 w4.3: v1(-12743.22,11410.89) -12731.52,11422.59 -12715.1,11422.59 -12703,11434.69 -12703,11447.97 -12714.31,11459.28 -12714.31,11465.36 -12708.22,11471.45 -12702.14,11471.45 -12690.83,11460.14 -12677.55,11460.14 -12666.32,11471.37 -12666.32,11484.65 -12677.63,11495.96 -12677.63,11502.04 -12671.54,11508.13 -12665.46,11508.13 -12654.15,11496.82 -12640.87,11496.82 -12625.39,11512.3 -12393,11512.3 -12386.7,11506 -12386.7,11495.01 v1(-12395.66,11486.05)
  BOTTOM w3.2: -12266.92,11364.62 U1.V1@-12232.72,11364.62
  BOTTOM w4: -12290.62,11364.62 -12266.92,11364.62
  BOTTOM w4.3: v1(-12395.66,11486.05) -12402.95,11486.05 -12409,11480 -12409,11467 -12402.56,11460.56 -12382.56,11460.56 -12368,11446 -12349,11446 -12331,11428 -12331,11405 -12290.62,11364.62
  BOTTOM w6.6: U2.B7@-12756.66,11397.45 v1(-12743.22,11410.89)
DDR_VPP: C58.1 C59.1 C80.1 FB4.2 U2.B1 U2.R9 | length 1238.6
  TOP w10: C80.1@-12899.67,10975.36 -12898.03,10977 C59.1@-12863,10977 -12835.59,10977 v5(-12833.1,10974.51) ; v5(-12551.77,11415.69) -12547.28,11411.2 C58.1@-12527.66,11411.2
  TOP w12: C58.1@-12527.66,11411.2 -12527.66,11411.34 -12513.6,11425.4
  TOP w15: v3(-12901,10953) -12899.67,10954.33 C80.1@-12899.67,10975.36 -12899.83,10975.52 FB4.2@-12899.83,11013.04 ; -12513.6,11425.4 -12487,11452 v3(-12487,11486)
  LAY6 w15: v3(-12901,10953) -12901,11016.04 -12880,11037.04 -12880,11165 -12909,11194 -12909,11439 -12862,11486 v3(-12487,11486)
  BOTTOM w10: v5(-12833.1,10974.51) U2.R9@-12819.66,10987.95 ; U2.B1@-12567.66,11397.45 -12567.66,11399.8 v5(-12551.77,11415.69)
DDR_VREFCA: C121.2 C122.1 C123.1 C124.1 R86.2 R87.1 TP13.1 U2.M1 | length 447.1
  TOP w10: TP13.1@-12608,11068 -12582.11,11068 v5(-12581.1,11069.01) -12576.53,11064.44 C123.1@-12574.66,11064.44 -12567.07,11064.44 -12557.06,11054.43 -12557.06,11004.06 v5(-12530.3,10977.3)
  BOTTOM w10: v5(-12581.1,11069.01) U2.M1@-12567.66,11082.45 ; v5(-12530.3,10977.3) -12489.3,10977.3 -12478,10966 -12478,10907.2 -12466.5,10895.7 C124.1@-12451,10895.7 C122.1@-12451,10869.7 -12458.69,10862.01 R87.1@-12458.69,10836.84 R86.2@-12458.69,10799.56 -12458.69,10773.39 C121.2@-12452,10766.7
DEBUG_RXD: D10.2 J6.2 R70.2 U10.2 | length 955.2
  TOP w4: J6.2@-12425.08,9411.76 -12368,9468.84 -12368,9554 v3(-12354,9568) D10.2@-12354,9588.71 ; U10.2@-11993.68,9952.16 -11993.68,9916.67 -11961.86,9884.85 R70.2@-11961.86,9870.41 v3(-11939.59,9870.41)
  LAY6 w3.8: v3(-12354,9568) -12354,9649 -12317,9686 -12055,9686 -11970,9771 -11970,9847 -11946.59,9870.41 v3(-11939.59,9870.41)
DEBUG_TXD: D8.2 J6.3 U10.3 | length 828.8
  TOP w4: J6.3@-12425.08,9511.76 -12391,9545.84 v3(-12391,9567) D8.2@-12391,9588.71 ; U10.3@-11974.08,9952.16 -11974.08,9913.08 -11962,9901 v3(-11950,9901)
  LAY6 w3.8: v3(-12391,9567) -12391,9630 -12324,9697 -12063,9697 -11980,9780 -11980,9856 -11950,9886 v3(-11950,9901)
DIO29_RF_PA: U9.42 U15.3 | length 614.2
  LYR3 w3.8: v1(-10215.52,10911.82) -10195.18,10911.82 -10086.9,11020.1 -10086.9,11337.1 -10064,11360 -10064,11377.39 v1(-10079.61,11393)
  BOTTOM w4: U15.3@-10223.51,10936.08 v1(-10215.52,10911.82) ; U9.42@-10105.39,11391.62 -10082.38,11391.62 -10081,11393 v1(-10079.61,11393)
DIO30_RF_SUB1G: U9.43 U15.7 | length 521.1
  LYR3 w3.8: v1(-10216,11014) -10114,11014 -10094.7,11033.3 -10094.7,11356.85 v1(-10079.61,11371.94)
  BOTTOM w4: v1(-10216,11014) -10215.27,11013.27 cw(c-10233.4,10995.14) U15.7@-10207.76,10995.14 ; U9.43@-10105.39,11371.94 v1(-10079.61,11371.94)
DVDD10: C93.1 C94.1 FB31.2 U6.21 | length 156.5
  TOP w12: FB31.2@-11581.94,11653.61 -11576.61,11653.61 v5(-11563,11640) v5@-11563,11636.66 ; v5@-11563,11636.66 -11549.13,11622.79 C94.1@-11549.13,11622.61 -11549.35,11622.39 C93.1@-11574.87,11622.39 -11574.87,11623.01 -11563,11634.88 v5@-11563,11636.66
  BOTTOM w8: U6.21@-11570.59,11675.55 -11582.2,11675.55 -11587,11670.75 -11587,11656 -11571,11640 v5(-11563,11640)
DVI_+5V: D6.4 D6.7 F1.2 J4.18 R64.1 R65.1 | length 1157.8
  LYR3 w15: J4.18@-11715.7,9900.5 -11715.7,9950.3 -11555,10111 -11145.57,10111 v1(-11126.7,10129.87)
  LYR3 w20: v1(-11126.7,10129.87) -11101.13,10129.87 -11015,10216 -11015,10331 v1(-10986,10360)
  BOTTOM w8: D6.7@-11126.7,10068.65 D6.4@-11126.7,10104.09 v1(-11126.7,10129.87)
  BOTTOM w20: R65.1@-10985.43,10340.86 -10985.43,10359.43 v1(-10986,10360) -10985.39,10360.61 R64.1@-10985.39,10378.86 -10985.39,10419.04 F1.2@-10984.43,10420
EEP_WP: R209.2 R213.1 U1.J22 U20.5 | length 716.1
  LYR3 w3.8: v1(-11819.34,11168.34) -11809.22,11158.22 -11809.22,11141.48 -11801.74,11134 -11792.9,11134 -11747,11088.1 -11747,11000 -11714.5,10967.5 ; -11713,10964.7 -11710,10961.7 -11710,10911 -11748,10873 -11748,10794 -11712,10758 v1(-11712,10665)
  LYR3 w4: -11714.5,10967.5 -11713,10966 -11713,10964.7
  BOTTOM w4: U20.5@-11820.47,10665.94 -11800.97,10665.94 -11796.7,10670.21 R213.1@-11766.86,10670.21 -11750.01,10670.21 -11749.81,10670.41 R209.2@-11730.14,10670.41 -11721.41,10670.41 -11716,10665 v1(-11712,10665) ; v1(-11819.34,11168.34) U1.J22@-11819.34,11187.46
EMMC_CLK: R16.1 U1.AB1 | length 265.2
  TOP w4: v5(-12319,11642.7) R16.1@-12300,11642.7
  BOTTOM w4: v5(-12319,11642.7) -12319,11597.7 -12278,11556.7 -12278,11469.7 -12251.66,11443.36 U1.AB1@-12232.72,11443.36
EMMC_CLK_S: R16.2 R20.1 U3.M6 | length 513.6
  TOP w4: v1(-12537,11905.7) -12535.86,11904.56 R20.1@-12519.17,11904.56 ; v1(-12376,11735.7) -12329,11735.7 -12311,11717.7 -12311,11674.95 -12300.75,11664.7 R16.2@-12300,11664.7
  LYR3 w3.8: v1(-12537,11905.7) -12521.7,11921 -12444,11921 -12359,11836 -12359,11752.7 v1(-12376,11735.7)
  BOTTOM w4: U3.M6@-12566.65,11925.87 -12546.48,11905.7 v1(-12537,11905.7)
EMMC_CMD: R13.2 U1.Y3 U3.M5 | length 1183.1
  TOP w4: R13.2@-12724.14,11941.49 -12724.14,11920.64 -12715,11911.5 v10(-12715,11898)
  LYR3 w3.8: v10(-12715,11898) -12715,11911.4 -12699.7,11926.7 -12596,11926.7 v1(-12578,11908.7)
  LAY6 w3.8: v10(-12715,11898) -12715,11771 -12750,11736 -12750,11646 -12717,11613 -12422.21,11613 v3(-12194.47,11385.26)
  BOTTOM w4: U3.M5@-12586.33,11925.87 -12586.33,11914.03 -12581,11908.7 v1(-12578,11908.7) ; v3(-12194.47,11385.26) -12193.35,11386.38 U1.Y3@-12193.35,11404
EMMC_D0: R12.2 U1.AA2 U3.A3 | length 682.2
  TOP w4: R12.2@-12658.86,11655.79 -12647.32,11667.33 v1(-12647.32,11677.52)
  LYR3 w3.8: v1(-12647.32,11677.52) -12647.32,11660.02 -12627,11639.7 -12409,11639.7 v1(-12392,11656.7)
  BOTTOM w3.2: v1(-12647.32,11677.52) -12638.41,11686.43 -12638.01,11686.43 -12625.7,11698.74 U3.A3@-12625.7,11709.34 ; -12245,11433.56 -12222.92,11433.56 U1.AA2@-12213.04,11423.68
  BOTTOM w4: v1(-12392,11656.7) -12382,11646.7 -12380,11646.7 -12285.2,11551.9 -12285.2,11464.9 -12253.86,11433.56 -12245,11433.56
EMMC_D1: R11.2 U1.AA1 U3.A4 | length 611.9
  TOP w4: R11.2@-12622.86,11655.79 -12622.86,11672.73 v5(-12622,11673.59)
  BOTTOM w4: U3.A4@-12606.02,11709.34 -12613.8,11701.56 -12613.8,11694.79 -12622,11686.59 v5(-12622,11673.59) -12622,11660.59 -12598.92,11637.51 -12383.81,11637.51 -12293,11546.7 -12293,11459.7 -12256.98,11423.68 U1.AA1@-12232.72,11423.68
EMMC_D2: R10.2 U1.AA3 U3.A5 | length 531.9
  LAY6 w3.8: v3(-12550.51,11655.7) -12422.7,11655.7 -12208.68,11441.68 v3(-12193.97,11441.68)
  BOTTOM w3.2: U3.A5@-12586.33,11709.34 -12586.33,11691.52 v3(-12550.51,11655.7)
  BOTTOM w4: v3(-12193.97,11441.68) -12193.97,11441.05 -12193.35,11440.43 U1.AA3@-12193.35,11423.68
EMMC_D3: R9.2 U1.Y4 U3.B2 | length 828.3
  TOP w4: R9.2@-12731.86,11655.79 -12731.86,11672.84 v3(-12731,11673.7)
  LAY6 w3.8: v3(-12731,11673.7) -12721.52,11664.22 -12708.12,11664.22 -12681.9,11638 -12419,11638 -12206.35,11425.35 v3(-12173.66,11425.35)
  BOTTOM w3.2: v3(-12731,11673.7) -12731,11692 -12723.46,11699.54 -12661.01,11699.54 -12660.55,11700 -12658.7,11700 -12655.19,11703.51 -12655.19,11719.22 U3.B2@-12645.39,11729.02
  BOTTOM w4: U1.Y4@-12173.66,11404 v3(-12173.66,11425.35)